# Altium PCB 下板20190911.PCBDOC
Units mm, origin at the board's own origin, x right, y up, seen from the top; angles counter-clockwise.
Board outline 146 x 45 mm, 2 copper layers (Top Layer, Bottom Layer); 4 components, 41 nets, 122 pads, 0 vias.
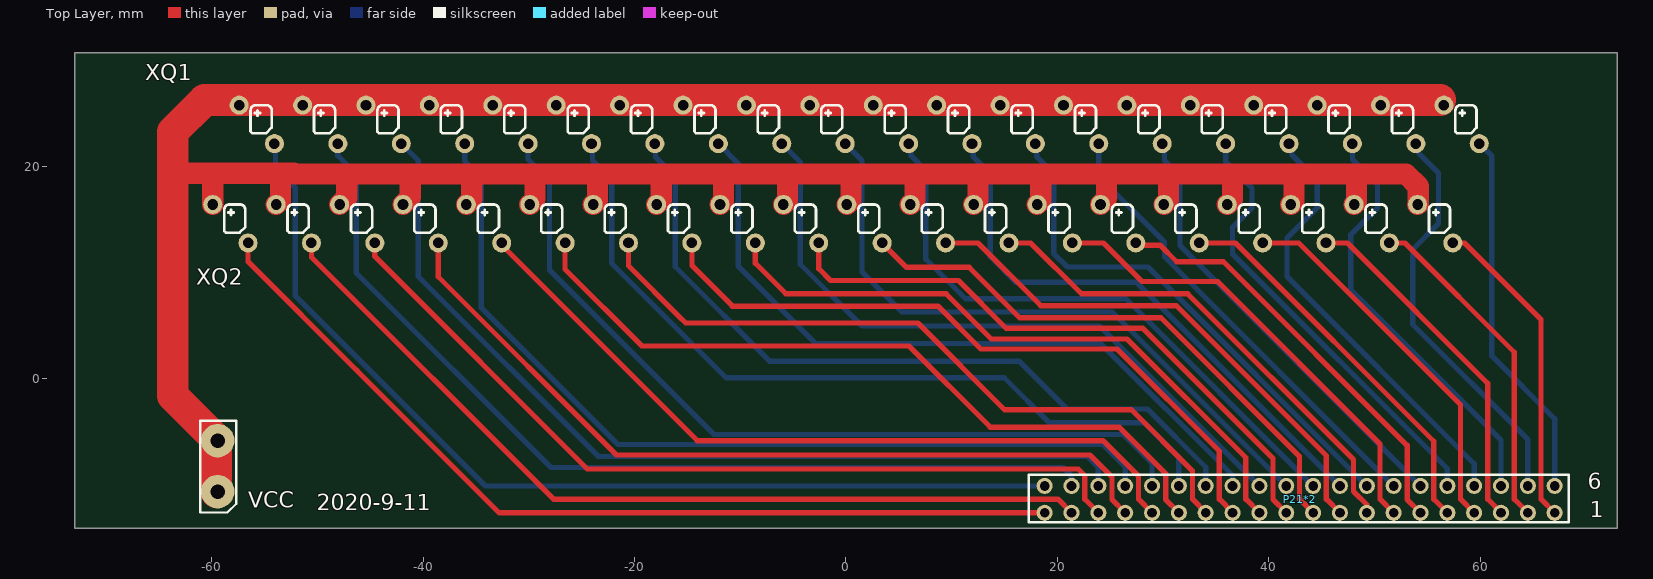
[diagram p0: Top Layer view]
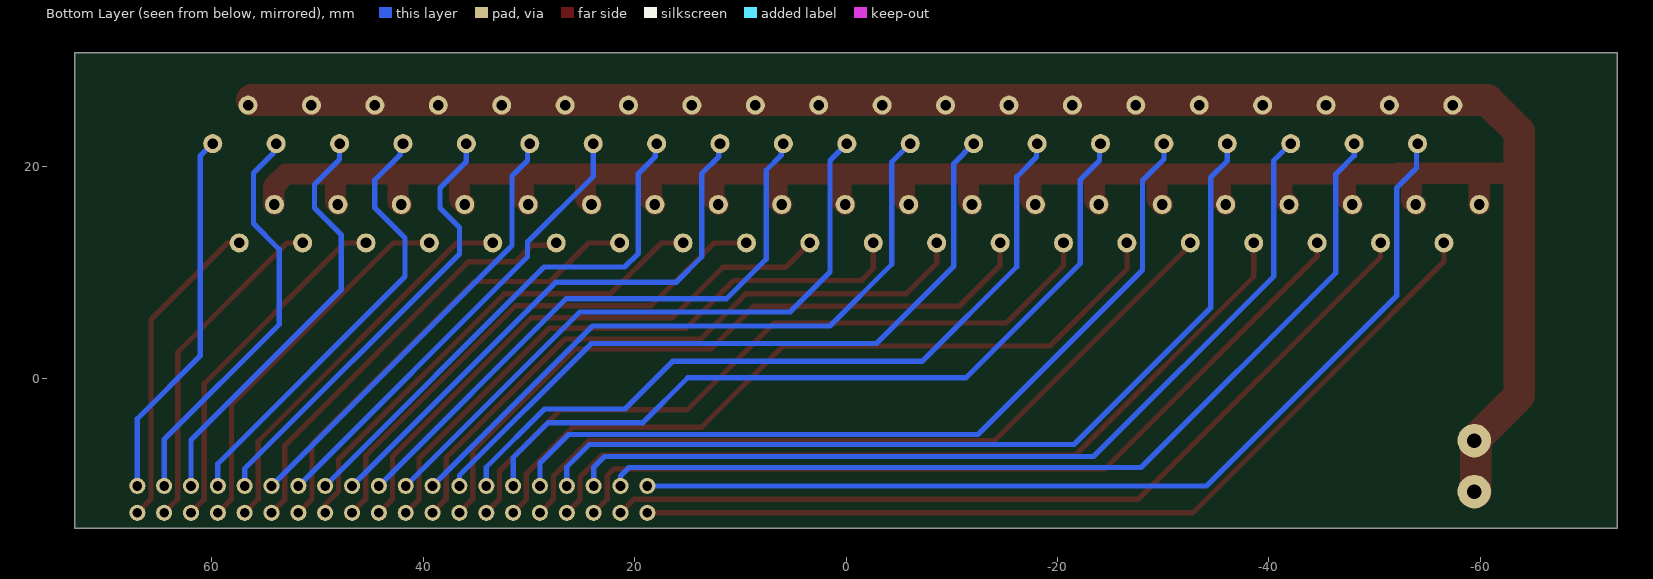
[diagram p1: Bottom Layer view, seen from below]

## Layer stack, top to bottom
Top Solder: solder mask 0.0102, Solder Resist, Dk 3.5
Top Layer: signal copper 0.0356
Dielectric1: dielectric 0.32, FR-4, Dk 4.8
Bottom Layer: signal copper 0.0356
Bottom Solder: solder mask 0.0102, Solder Resist, Dk 3.5

## Board outline
-72.999,-14.2 -72.999,30.8 73.001,30.8 73.001,-14.2

## Design rules (kind name [scope] priority, off if disabled: settings)
Clearance [All] p1: gap=0.152 ignorepadtopadclearanceinfootprint=FALSE
FabricationTestPointUsage TestPointUsage [All] p1: valid=0 allowmultiple=FALSE
FabricationTestpoint Testpoint [All] p1: side=3 testpointundercomponent=TRUE minsize=1.016 maxsize=2.54 preferedsize=1.524 minholesize=0 maxholesize=1.016 preferedholesize=0.813 testpointgrid=0.025 allowsidetop=TRUE allowsidebottom=TRUE usegrid=TRUE gridtolerance=0
PolygonConnect [All] p1: connectstyle=Relief reliefconductorwidth=0.254 reliefentries=4 polygonreliefangle="90 Angle" airgapwidth=0.254
RoutingVias [All] p1: holewidth=0.8 width=1.6 viastyle="Through Hole" minholewidth=0.711 minwidth=1.27 maxholewidth=0.711 maxwidth=1.27
SilkToSolderMaskClearance SilkscreenOverComponentPads [IsPad] p1: minsilkscreentomaskgap=0.254 clearancetoexposedcopper=TRUE
SolderMaskExpansion [All] p1: expansion=0.102 istentingtop=FALSE
Width Width_1 [All] p1: maxlimit=5.08 minlimit=0.254 preferedwidth=0.381 minimp=50.000000 maximp=50.000000 favimp=50.000000
Width [InNet('GND')] p2: maxlimit=5.08 minlimit=0.254 preferedwidth=0.381 minimp=50.000000 maximp=50.000000 favimp=50.000000
27 further rules are at their usual default settings.

## Classes and differential pairs
component class 盲文原理图1: 1

## Components (designator, comment, footprint, x,y, rotation, side; value= is the part's Value field where it differs from the comment)
P21*2 "Header 21X2" XinPian 18.8,-12.751 r180 top
XQ1 "Comment" XIANQUAN1 -57.419,25.82 r0 top
XQ2 "Comment" XIANQUAN1 -59.919,16.42 r0 top
? "" N1A -59.45,-5.925 r180 top

## Footprints (in the part's own frame and the unit in brackets; to place one, negate y for a bottom-side part, rotate by r counter-clockwise, add the part's x,y. Pads: shape width x height; smd on the part's side, far side on the other; paste and mask are expansions set on the pad)
N1A [mil]
  round 125 hole 55: 1(0,0) 2(0,190)
  silkscreen extent -69,-74 65,268
XIANQUAN1 [mm]
  round 1.8 hole 1: 1(3.34,-3.64) 1(9.34,-3.64) 1(15.34,-3.64) 1(21.34,-3.64) 1(27.34,-3.64) 1(33.34,-3.64) 1(39.34,-3.64) 1(45.34,-3.64) 1(51.34,-3.64) 1(57.34,-3.64) 1(63.34,-3.64) 1(69.34,-3.64) 1(75.34,-3.64) 1(81.34,-3.64) 1(87.34,-3.64) 1(93.34,-3.64) 1(99.34,-3.64) 1(105.34,-3.64) 1(111.34,-3.64) 1(117.34,-3.64) 2(0,0) 2(6,0) 2(12,0) 2(18,0) 2(24,0) 2(30,0) 2(36,0) 2(42,0) 2(48,0) 2(54,0) 2(60,0) 2(66,0) 2(72,0) 2(78,0) 2(84,0) 2(90,0) 2(96,0) 2(102,0) 2(108,0) 2(114,0)
  silkscreen extent 1.08,-2.67 117.08,0
XinPian [mil]
  round 60 hole 36: 1(0,-100) 2(-100,-100) 3(-200,-100) 4(-300,-100) 5(-400,-100) 6(-500,-100) 7(-600,-100) 8(-700,-100) 9(-800,-100) 10(-900,-100) 11(-1000,-100) 12(-1100,-100) 13(-1200,-100) 14(-1300,-100) 15(-1400,-100) 16(-1500,-100) 17(-1600,-100) 18(-1700,-100) 19(-1800,-100) 20(-1900,-100) 21(-1900,0) 22(-1800,0) 23(-1700,0) 24(-1600,0) 25(-1500,0) 26(-1400,0) 27(-1300,0) 28(-1200,0) 29(-1100,0) 30(-1000,0) 31(-900,0) 32(-800,0) 33(-700,0) 34(-600,0) 35(-500,0) 36(-400,0) 37(-300,0) 38(-200,0) 39(-100,0) 40(0,0)
  silkscreen extent -1953,-142 59,35

## Part data
P21*2: library part "Header 22X2", "Header, 22-Pin, Dual row"

## Nets (pads, with @x,y where several pads share a name; then routed paths per layer and width w, separated by ;. In a path a pad name is that pad's centre, name@x,y a point inside that pad or via, vN(x,y) a via of type N, cw(c..) or ccw(c..) an arc to the next point about the centre after c; other vN are vias at no path point)
GND: ?.1 ?.2 XQ1.2 XQ2.2 | length 335.3
  Top Layer w1.27: -52.24,19.37 -52.235,19.375
  Top Layer w2: -63.7,19.32 -63.65,19.37 -59.919,19.37 ; XQ2.2@-59.919,16.42 -59.919,19.37 ; XQ2.2@-53.919,16.42 -53.518,16.821 -53.518,19.37 ; -52.24,19.37 -53.518,19.37 ; -52.235,19.32 -47.244,19.32 ; XQ2.2@-47.919,16.42 -47.244,17.095 -47.244,19.32 ; XQ2.2@-41.919,16.42 -41.224,17.115 -41.224,19.32 ; XQ2.2@-35.919,16.42 -35.408,16.931 -35.408,19.32 ; XQ2.2@-29.919,16.42 -29.413,16.926 -29.413,19.32 ; XQ2.2@-23.919,16.42 -23.52,16.818 -23.52,19.32 ; XQ2.2@-17.919,16.42 -17.475,16.864 -17.475,19.32 ; XQ2.2@-11.919,16.42 -11.582,16.756 -11.582,19.32 ; XQ2.2@-5.919,16.42 -5.537,16.802 -5.537,19.32 ; XQ2.2@0.081,16.42 0.457,16.796 0.457,19.32 ; XQ2.2@6.081,16.42 6.528,16.867 6.528,19.32 ; XQ2.2@12.081,16.42 12.495,16.834 12.495,19.32 ; XQ2.2@18.081,16.42 18.425,16.764 18.425,19.32 ; XQ2.2@24.081,16.42 24.638,16.977 24.638,19.32 ; XQ2.2@30.081,16.42 30.505,16.844 30.505,19.32 ; XQ2.2@36.081,16.42 36.58,16.919 36.58,19.32 ; XQ2.2@42.081,16.42 42.393,16.731 42.393,19.32 ; XQ2.2@48.081,16.42 48.311,16.65 48.311,19.32 ; XQ2.2@54.081,16.42 54.153,16.492 54.153,18.148 52.981,19.32 48.311,19.32 ; -59.919,19.37 -53.518,19.37 ; -47.244,19.32 -41.224,19.32 ; -41.224,19.32 -35.408,19.32 ; -35.408,19.32 -29.413,19.32 ; -29.413,19.32 -23.52,19.32 ; -23.52,19.32 -17.475,19.32 ; -17.475,19.32 -11.582,19.32 ; -11.582,19.32 -5.537,19.32 ; -5.537,19.32 0.457,19.32 ; 0.457,19.32 6.528,19.32 ; 6.528,19.32 12.495,19.32 ; 12.495,19.32 18.425,19.32 ; 18.425,19.32 24.638,19.32 ; 24.638,19.32 30.505,19.32 ; 30.505,19.32 36.58,19.32 ; 36.58,19.32 42.393,19.32 ; 42.393,19.32 48.311,19.32
  Top Layer w3: ?.2@-59.575,-10.792 ?.1@-59.575,-6.279 ; ?.1 -63.7,-1.675 -63.7,19.32 -63.7,23.3 -60.7,26.3 -57.419,26.3 -51.419,26.3 -45.419,26.3 -39.419,26.3 -33.419,26.3 -27.419,26.3 -21.419,26.3 -15.419,26.3 -9.419,26.3 -3.419,26.3 2.581,26.3 8.581,26.3 14.581,26.3 20.581,26.3 26.581,26.3 32.581,26.3 38.581,26.3 44.581,26.3 50.581,26.3 XQ1.2@56.232,26.3
XQ1_1: P21*2.20 XQ1.1@59.921,22.18 | length 35.3
  Bottom Layer w0.5: XQ1.1@59.921,22.18 61.11,20.991 61.11,2.088 67.06,-3.861 P21*2.20
XQ1_2: P21*2.19 XQ1.1@53.921,22.18 | length 38.8
  Bottom Layer w0.5: XQ1.1@53.921,22.18 54.17,21.931 54.17,21.293 56.075,19.388 56.075,14.625 53.625,12.175 53.625,5.074 64.52,-5.821 P21*2.19
XQ1_3: P21*2.18 XQ1.1@47.921,22.18 | length 40.3
  Bottom Layer w0.5: XQ1.1@47.921,22.18 47.921,20.673 50.3,18.294 50.3,16.1 47.775,13.575 47.775,8.324 61.98,-5.881 P21*2.18
XQ1_4: P21*2.17 XQ1.1@41.921,22.18 | length 42
  Bottom Layer w0.5: XQ1.1@41.921,22.18 42.17,21.931 42.17,21.167 44.581,18.756 44.581,16.1 41.725,13.244 41.725,9.604 59.44,-8.111 P21*2.17
XQ1_5: P21*2.16 XQ1.1@35.921,22.18 | length 42.6
  Bottom Layer w0.5: XQ1.1@35.921,22.18 35.921,20.492 38.425,17.988 38.425,16.1 36.58,14.255 36.58,11.739 56.9,-8.581 P21*2.16
XQ1_6: P21*2.15 XQ1.1@29.921,22.18 | length 42.5
  Bottom Layer w0.5: XQ1.1@29.921,22.18 30.141,21.961 30.141,20.583 31.609,19.115 31.609,12.54 P21*2.15
XQ1_7: P21*2.14 XQ1.1@23.921,22.18 | length 43.9
  Bottom Layer w0.5: XQ1.1@23.921,22.18 23.921,19.08 30.134,12.867 30.134,11.475 P21*2.14
XQ1_8: P21*2.13 XQ1.1@17.921,22.18 | length 49.8
  Bottom Layer w0.5: XQ1.1@18.011,22.18 18.043,22.148 18.043,20.969 19.65,19.362 19.65,11.8 20.95,10.5 28.569,10.5 P21*2.13
XQ1_9: P21*2.12 XQ1.1@11.921,22.18 | length 53.5
  Bottom Layer w0.5: XQ1.1@11.921,22.18 12.031,22.07 12.031,20.956 13.65,19.337 13.65,11.475 16.075,9.05 27.479,9.05 P21*2.12
XQ1_10: P21*2.11 XQ1.1@5.921,22.18 | length 57.1
  Bottom Layer w0.5: XQ1.1@5.921,22.18 6.139,21.962 6.139,21.064 7.549,19.654 7.549,11.249 11.299,7.5 26.489,7.5 P21*2.11
XQ1_11: P21*2.10 XQ1.1@-0.079,22.18 | length 61.3
  Bottom Layer w0.5: XQ1.1@-0.079,22.18 1.514,20.587 1.514,10.025 5.289,6.25 25.199,6.25 P21*2.10
XQ1_12: P21*2.9 XQ1.1@-6.079,22.18 | length 64.3
  Bottom Layer w0.5: XQ1.1@-6.079,22.18 -4.33,20.432 -4.33,10.77 1.514,4.925 23.984,4.925 P21*2.9
XQ1_13: P21*2.8 XQ1.1@-12.079,22.18 | length 68.3
  Bottom Layer w0.5: XQ1.1@-12.079,22.18 -10.2,20.301 -10.2,10.6 -2.875,3.275 24.1,3.275 36.58,-9.205 P21*2.8
XQ1_14: P21*2.7 XQ1.1@-18.079,22.18 | length 72.3
  Bottom Layer w0.5: XQ1.1@-18.079,22.18 -18.023,22.124 -18.023,20.903 -16.154,19.035 -16.154,10.528 -7.201,1.575 16.425,1.575 20.925,-2.925 28.525,-2.925 34.04,-8.44 P21*2.7
XQ1_15: P21*2.6 XQ1.1@-24.079,22.18 | length 76
  Bottom Layer w0.5: XQ1.1@-23.989,22.18 -23.989,20.592 -22.175,18.778 -22.175,10.864 -11.336,0.025 14.975,0.025 19.225,-4.225 28.175,-4.225 31.5,-7.55 P21*2.6
XQ1_16: P21*2.5 XQ1.1@-30.079,22.18 | length 79.6
  Bottom Layer w0.5: XQ1.1@-30.079,22.18 -30.079,20.704 -28.575,19.2 -28.559,19.2 -28.05,18.691 -28.05,10.225 -12.475,-5.35 26.275,-5.35 28.96,-8.035 P21*2.5
XQ1_17: P21*2.4 XQ1.1@-36.079,22.18 | length 85.2
  Bottom Layer w0.5: XQ1.1@-36.079,22.18 -36.079,20.545 -34.5,18.966 -34.5,6.625 -21.575,-6.3 24.3,-6.3 26.42,-8.42 P21*2.4
XQ1_18: P21*2.3 XQ1.1@-42.079,22.18 | length 86.8
  Bottom Layer w0.5: XQ1.1@-41.989,22.18 -41.989,22.09 -40.475,20.576 -40.475,9.614 -23.436,-7.425 22.85,-7.425 23.88,-8.455 P21*2.3
XQ1_19: P21*2.2 XQ1.1@-48.079,22.18 | length 89.5
  Bottom Layer w0.5: XQ1.1@-48.079,22.18 -48.079,21.029 -46.35,19.3 -46.35,9.959 -27.916,-8.475 20.55,-8.475 21.34,-9.265 P21*2.2
XQ1_20: P21*2.1 XQ1.1@-54.079,22.18 | length 93.5
  Bottom Layer w0.5: XQ1.1@-53.989,22.18 -53.989,19.864 -52.1,17.975 -52.1,7.77 -34.118,-10.211 P21*2.1
XQ2_1: P21*2.21 XQ2.1@57.421,12.78 | length 30.2
  Top Layer w0.5: XQ2.1@57.421,12.78 58.543,12.78 65.773,5.551 65.773,-11.464 P21*2.21
XQ2_2: P21*2.22 XQ2.1@51.421,12.78 | length 31.8
  Top Layer w0.5: XQ2.1@51.421,12.78 52.893,12.78 63.233,2.44 63.233,-11.464 P21*2.22
XQ2_3: P21*2.23 XQ2.1@45.421,12.78 | length 33.6
  Top Layer w0.381: P21*2.23 P21*2.23@61.98,-12.716
  Top Layer w0.5: XQ2.1@45.421,12.78 47.445,12.78 60.728,-0.503 60.728,-11.464 P21*2.23@61.98,-12.716
XQ2_4: P21*2.24 XQ2.1@39.421,12.78 | length 35.8
  Top Layer w0.5: XQ2.1@39.421,12.78 42.845,12.78 58.153,-2.528 58.153,-11.464 P21*2.24
XQ2_5: P21*2.25 XQ2.1@33.421,12.78 | length 37.3
  Top Layer w0.5: XQ2.1@33.421,12.78 36.845,12.78 55.613,-5.988 55.613,-11.464 P21*2.25
XQ2_6: P21*2.26 XQ2.1@27.421,12.78 | length 40.5
  Top Layer w0.5: XQ2.1@27.421,12.78 27.628,12.573 29.722,12.573 31.295,11 35.725,11 53.1,-6.375 53.1,-11.491 P21*2.26
XQ2_7: P21*2.27 XQ2.1@21.421,12.78 | length 44
  Top Layer w0.5: XQ2.1@21.421,12.78 24.37,12.78 28.025,9.125 35.174,9.125 50.533,-6.234 50.533,-11.464 P21*2.27
XQ2_8: P21*2.28 XQ2.1@15.421,12.78 | length 46.6
  Top Layer w0.5: XQ2.1@15.421,12.78 17.471,12.78 22.276,7.975 32.325,7.975 48.028,-7.728 48.028,-10.73 49.28,-11.982 P21*2.28
XQ2_9: P21*2.29 XQ2.1@9.421,12.78 | length 50.3
  Top Layer w0.5: XQ2.1@9.421,12.78 12.495,12.78 18.425,6.85 31.249,6.85 45.453,-7.354 45.453,-11.464 P21*2.29
XQ2_10: P21*2.30 XQ2.1@3.421,12.78 | length 53.7
  Top Layer w0.5: XQ2.1@3.421,12.78 5.726,10.475 11.662,10.475 16.433,5.704 29.795,5.704 42.913,-7.414 42.913,-11.464 P21*2.30
XQ2_11: P21*2.31 XQ2.1@-2.579,12.78 | length 58.5
  Top Layer w0.5: XQ2.1@-2.579,12.78 -2.579,10.351 -1.453,9.225 10.637,9.225 15.162,4.7 28.099,4.7 40.4,-7.601 40.4,-11.491 P21*2.31
XQ2_12: P21*2.32 XQ2.1@-8.579,12.78 | length 61.7
  Top Layer w0.5: XQ2.1@-8.579,12.78 -8.579,10.86 -5.694,7.975 9.475,7.975 13.75,3.7 26.585,3.7 37.833,-7.548 37.833,-11.464 P21*2.32
XQ2_13: P21*2.33 XQ2.1@-14.579,12.78 | length 65.7
  Top Layer w0.381: P21*2.33 P21*2.33@36.58,-12.716
  Top Layer w0.5: XQ2.1@-14.579,12.78 -14.579,10.629 -10.75,6.8 8.7,6.8 12.75,2.75 25.649,2.75 35.328,-6.929 35.328,-11.464 P21*2.33@36.58,-12.716
XQ2_14: P21*2.34 XQ2.1@-20.579,12.78 | length 68
  Top Layer w0.381: P21*2.34 P21*2.34@34.04,-12.716
  Top Layer w0.5: XQ2.1@-20.579,12.78 -20.579,10.619 -15.747,5.787 -15.16,5.2 6.8,5.2 15,-3 27,-3 32.788,-8.788 32.788,-11.464 P21*2.34@34.04,-12.716
XQ2_15: P21*2.35 XQ2.1@-26.579,12.78 | length 71.5
  Top Layer w0.5: XQ2.1@-26.579,12.78 -26.579,10.289 -19.315,3.025 5.975,3.025 13.65,-4.65 25.849,-4.65 30.248,-9.049 30.248,-11.499 P21*2.35
XQ2_16: P21*2.36 XQ2.1@-32.579,12.78 | length 73.9
  Top Layer w0.5: XQ2.1@-32.2,13.3 -32.2,12.2 -14.075,-5.925 24.324,-5.925 27.673,-9.274 27.673,-11.464 P21*2.36
XQ2_17: P21*2.37 XQ2.1@-38.579,12.78 | length 78.7
  Top Layer w0.5: XQ2.1@-38.579,12.78 -38.579,9.579 -21.725,-7.275 23.074,-7.275 25.168,-9.369 25.168,-11.499 P21*2.37
XQ2_18: P21*2.38 XQ2.1@-44.579,12.78 | length 81.1
  Top Layer w0.5: XQ2.1@-44.579,12.78 -44.579,11.499 -24.478,-8.601 21.976,-8.601 22.593,-9.218 22.593,-11.464 P21*2.38
XQ2_19: P21*2.39 XQ2.1@-50.579,12.78 | length 83.3
  Top Layer w0.5: XQ2.1@-50.579,12.78 -50.579,11.429 -27.686,-11.464 20.053,-11.464 P21*2.39
XQ2_20: P21*2.40 XQ2.1@-56.579,12.78 | length 87
  Top Layer w0.5: XQ2.1@-56.579,12.78 -56.579,11.009 -46.296,0.726 -32.818,-12.751 P21*2.40

## Silkscreen, mask and mechanical layers (free items; w line width, h text height)
Top Overlay:
  text "6" at 70.18,-10.541 h1.52
  text "VCC" at -56.54,-12.268 h1.52
  text "2020-9-11" at -50.075,-12.493 h1.52
  text "1" at 70.383,-13.183 h1.52
Mechanical 1:
  circle w0.254: c67.5,19.3 r1.5
  circle w0.254: c67.5,13.8 r1.5
  circle w0.254: c-67.5,19.3 r1.5
  circle w0.254: c-67.5,13.8 r1.5
  circle w0.254: c31.751,21.99 r0.65
  circle w0.254: c34.251,16.99 r0.65
  circle w0.254: c28.251,16.99 r0.65
  circle w0.254: c25.751,21.99 r0.65
  circle w0.254: c22.251,16.99 r0.65
  circle w0.254: c19.751,21.99 r0.65
  circle w0.254: c37.751,21.99 r0.65
  circle w0.254: c40.251,16.99 r0.65
  circle w0.254: c43.751,21.99 r0.65
  circle w0.254: c46.251,16.99 r0.65
  circle w0.254: c52.251,16.99 r0.65
  circle w0.254: c49.751,21.99 r0.65
  circle w0.254: c55.751,21.99 r0.65
  circle w0.254: c58.251,16.99 r0.65
  circle w0.254: c-4.249,21.99 r0.65
  circle w0.254: c-1.749,16.99 r0.65
  circle w0.254: c-7.749,16.99 r0.65
  circle w0.254: c-10.249,21.99 r0.65
  circle w0.254: c-13.749,16.99 r0.65
  circle w0.254: c-16.249,21.99 r0.65
  circle w0.254: c1.751,21.99 r0.65
  circle w0.254: c4.251,16.99 r0.65
  circle w0.254: c7.751,21.99 r0.65
  circle w0.254: c10.251,16.99 r0.65
  circle w0.254: c16.251,16.99 r0.65
  circle w0.254: c13.751,21.99 r0.65
  circle w0.254: c-22.249,21.99 r0.65
  circle w0.254: c-19.749,16.99 r0.65
  circle w0.254: c-25.749,16.99 r0.65
  circle w0.254: c-28.249,21.99 r0.65
  circle w0.254: c-31.749,16.99 r0.65
  circle w0.254: c-34.249,21.99 r0.65
  circle w0.254: c-52.249,21.99 r0.65
  circle w0.254: c-49.749,16.99 r0.65
  circle w0.254: c-55.749,16.99 r0.65
  circle w0.254: c-58.249,21.99 r0.65
  circle w0.254: c-46.249,21.99 r0.65
  circle w0.254: c-43.749,16.99 r0.65
  circle w0.254: c24,0 r1.5
  circle w0.254: c-24,0 r1.5
  circle w0.254: c67.5,24.8 r1.5
  circle w0.254: c-67.5,24.8 r1.5
  circle w0.254: c-37.749,16.99 r0.65
  circle w0.254: c-40.249,21.99 r0.65
  lines w0.254: -72.999,-14.2 73.001,-14.2 73.001,30.8 -72.999,30.8 -72.999,-14.2